# Altium PCB PCB_DesktopAirSensor_2022-05-23.pcbdoc
Units mil, origin at the board's own origin, x right, y up, seen from the top; angles counter-clockwise.
Board outline 3960 x 3620 mil, 2 copper layers (Top Layer, Bottom Layer); 12 components, 47 nets, 83 pads, 6 vias.
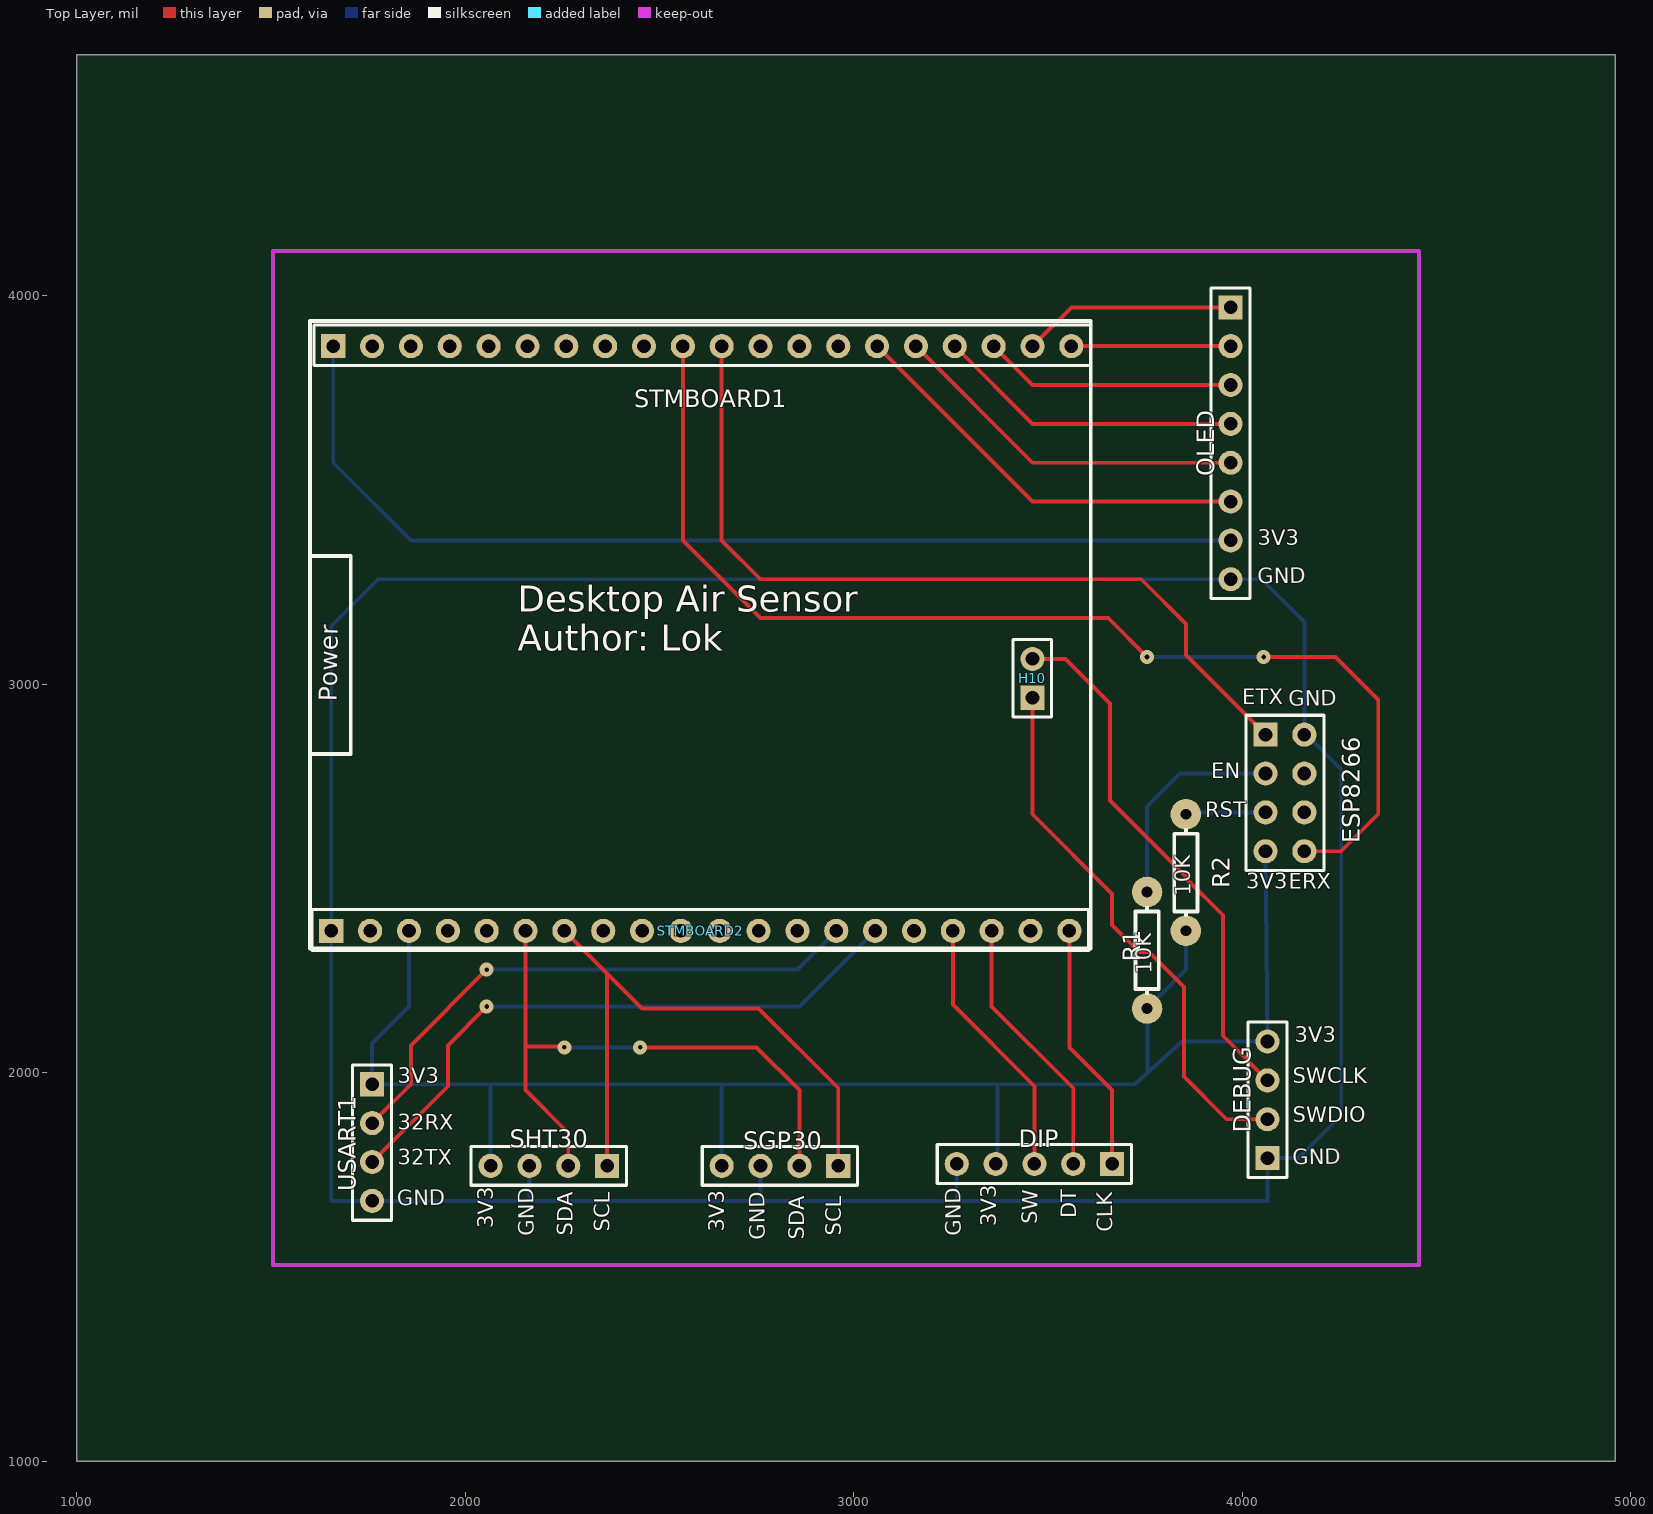
[diagram p0: Top Layer view]
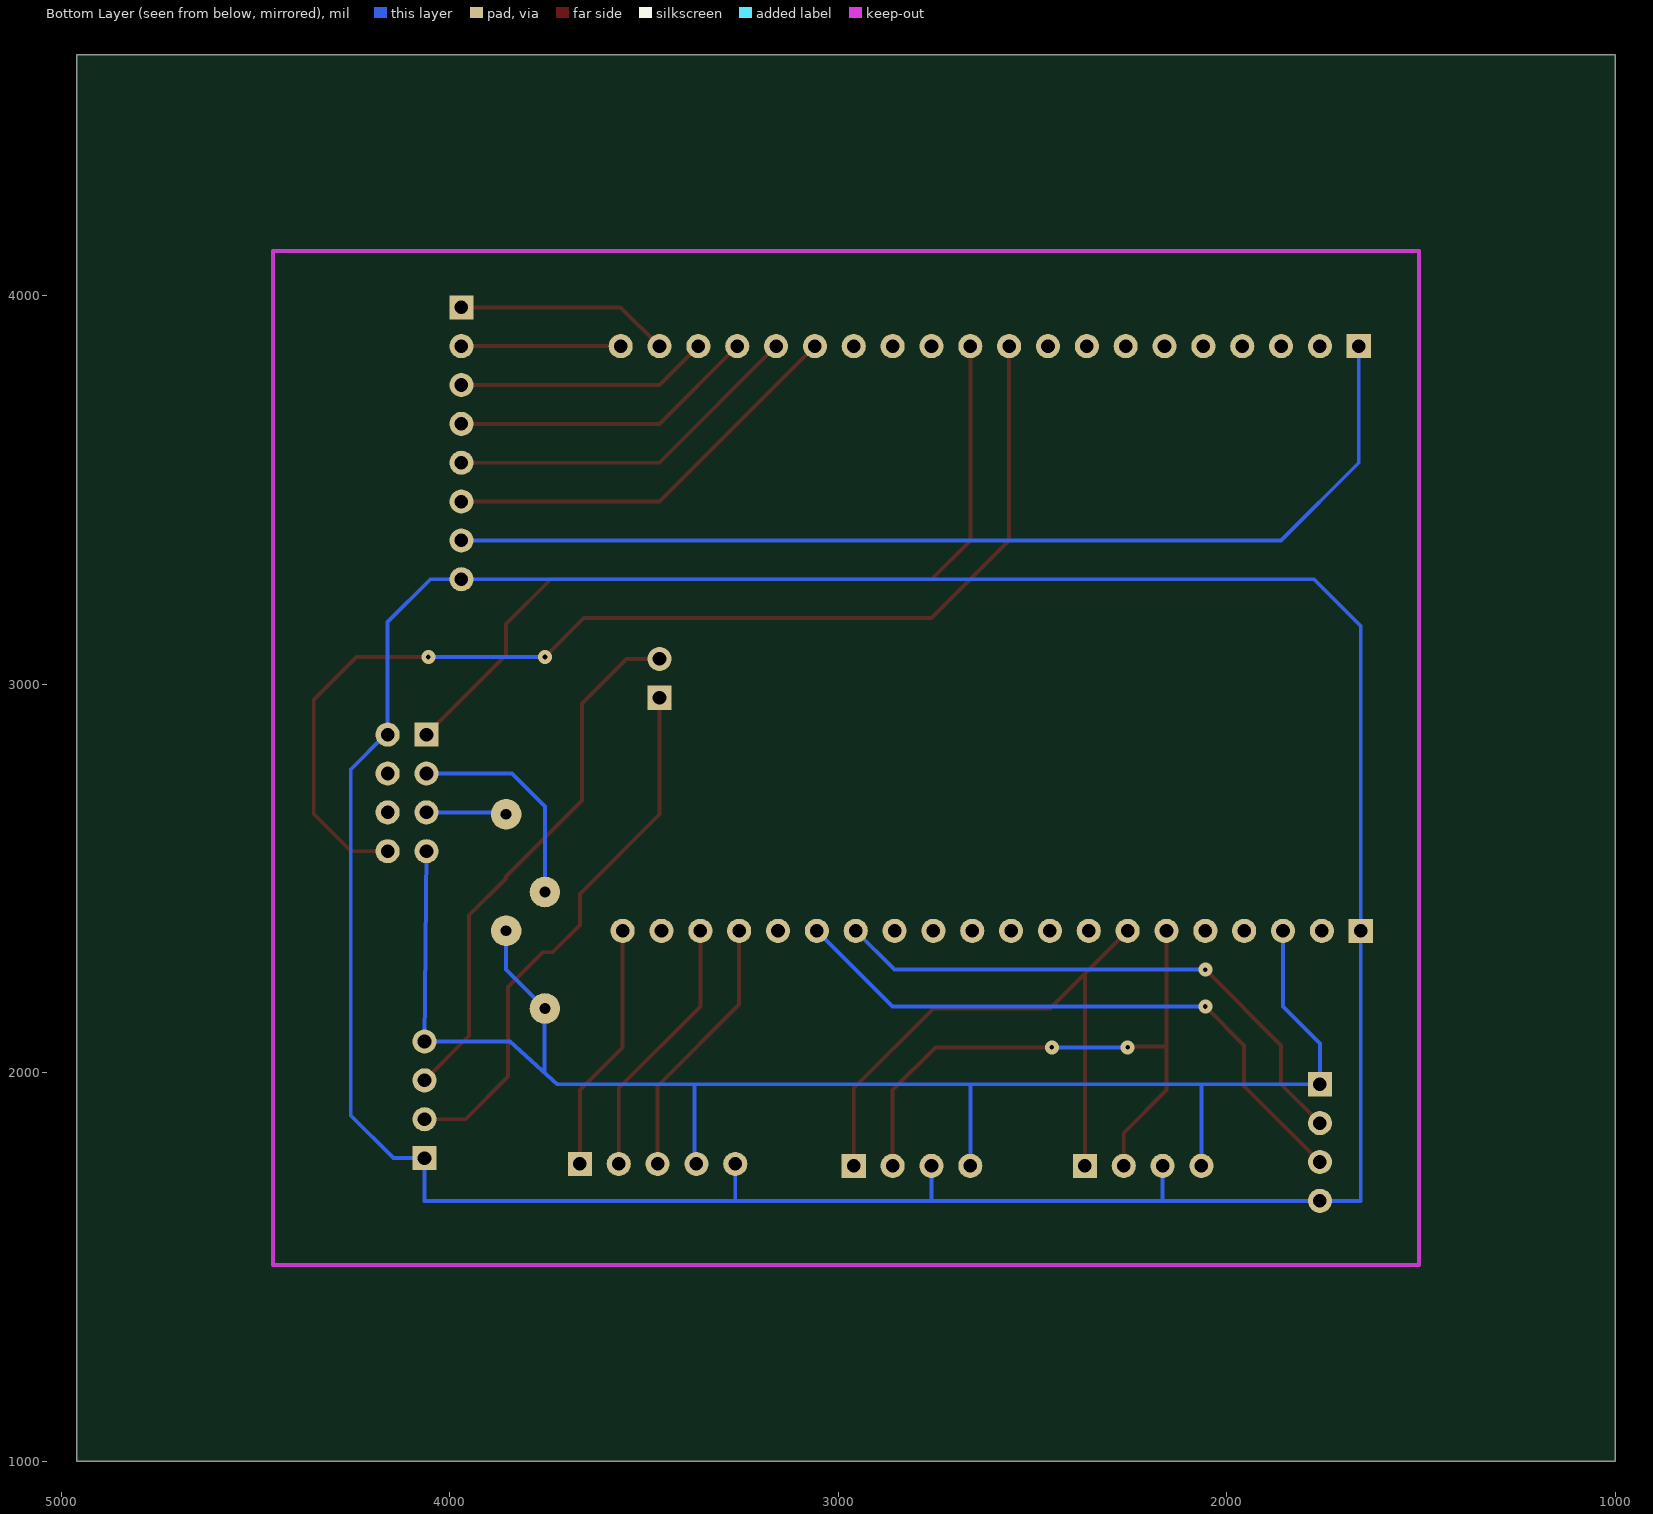
[diagram p1: Bottom Layer view, seen from below]

## Layer stack, top to bottom
Top Solder: solder mask 0.4, Solder Resist, Dk 3.5
Top Layer: signal copper 1.4
Dielectric1: dielectric 12.6, FR-4, Dk 4.8
Bottom Layer: signal copper 1.4
Bottom Solder: solder mask 0.4, Solder Resist, Dk 3.5

## Board outline
4960,1000 1000,1000 1000,4620 4960,4620

## Design rules (kind name [scope] priority, off if disabled: settings)
Clearance [All] p1: gap=10 ignorepadtopadclearanceinfootprint=FALSE except(0: Arc-Hole Track-Hole SMDPad-Hole THPad-Hole Via-Hole Fill-Hole Poly-Hole Region-Hole Text-Hole)
PolygonConnect [All] p1: connectstyle=Relief reliefconductorwidth=10 reliefentries=4 polygonreliefangle="90 Angle" airgapwidth=10
RoutingVias [All] p1: holewidth=28 width=50 viastyle="Through Hole" minholewidth=28 minwidth=50 maxholewidth=28 maxwidth=50
SolderMaskExpansion [All] p1: expansion=4
Width [All] p1: maxlimit=10 minlimit=10 preferedwidth=10
30 further rules are at their usual default settings.

## Components (designator, comment, footprint, x,y, rotation, side; value= is the part's Value field where it differs from the comment)
DEBUG "Debug" HDR-F-2.54_1X4 4065,1930 r90 top
DIP "拨码开关" HDR-F-2.54_1X5 3465,1765 r180 top
ESP8266 "ESP8266" HDR-F-2.54_2X4 4110,2720 r270 top
H10 "STM32 Debug" HDR-F-2.54_1X2 3460,3015 r90 top
OLED "OLED" HDR-F-2.54_1X8 3970,3670 r270 top
R1 "10k" ? 3755,2315 r90 top
R2 "10k" ? 3855,2515 r90 top
SGP30 "SGP30" HDR-F-2.54_1X4 2810,1760 r180 top
SHT30 "SHT30" HDR-F-2.54_1X4 2215,1760 r180 top
STMBOARD1 "STM32板1" HDR-F-2.54_1X20 2610,3870 r0 top
STMBOARD2 "STM32板2" HDR-F-2.54_1X20 2605,2365 r0 top
USART1 "socket" HDR-F-2.54_1X4 1760,1820 r270 top

## Footprints (in the part's own frame and the unit in brackets; to place one, negate y for a bottom-side part, rotate by r counter-clockwise, add the part's x,y. Pads: shape width x height; smd on the part's side, far side on the other; paste and mask are expansions set on the pad)
HDR-F-2.54_1X2 [mil]
  rect 62x62 hole 35: 1(-50,0)
  round 62 hole 35: 2(50,0)
  silkscreen extent -100,-49 100,50
HDR-F-2.54_1X4 [mil]
  rect 62x62 hole 35: 1(-150,0)
  round 62 hole 35: 2(-50,0) 3(50,0) 4(150,0)
  silkscreen extent -200,-50 200,50
HDR-F-2.54_1X5 [mil]
  rect 62x62 hole 35: 1(-200,0)
  round 62 hole 35: 2(-100,0) 3(0,0) 4(100,0) 5(200,0)
  silkscreen extent -250,-50 250,50
HDR-F-2.54_1X8 [mil]
  rect 62x62 hole 35: 1(-300,0)
  round 62 hole 35: 2(-200,0) 3(-100,0) 4(0,0) 5(100,0) 6(200,0) 7(300,0) 8(400,0)
  silkscreen extent -350,-50 450,50
HDR-F-2.54_1X20 [mil]
  rect 62x62 hole 35: 1(-950,0)
  round 62 hole 35: 2(-850,0) 3(-750,0) 4(-650,0) 5(-550,0) 6(-450,0) 7(-350,0) 8(-250,0) 9(-150,0) 10(-50,0) 11(50,0) 12(150,0) 13(250,0) 14(350,0) 15(450,0) 16(550,0) 17(650,0) 18(750,0) 19(850,0) 20(950,0)
  silkscreen extent -1000,-50 1000,55
HDR-F-2.54_2X4 [mil]
  rect 62x62 hole 35: 1(-150,-50)
  round 62 hole 35: 2(-150,50) 3(-50,-50) 4(-50,50) 5(50,-50) 6(50,50) 7(150,-50) 8(150,50)
  silkscreen extent -200,-100 200,100
? [mm]
  round 2 hole 0.7: 1(-3.81,0) 2(3.81,0)
  silkscreen extent -2.79,-0.76 2.79,0.76

## Via types
v1: diameter 35.83, hole 12, Top Layer to Bottom Layer, tented both sides, 6 vias

## Nets (pads, with @x,y where several pads share a name; then routed paths per layer and width w, separated by ;. In a path a pad name is that pad's centre, name@x,y a point inside that pad or via, vN(x,y) a via of type N, cw(c..) or ccw(c..) an arc to the next point about the centre after c; other vN are vias at no path point)
DEBUG_2: DEBUG.2 H10.1 | length 1411.8
  Top Layer w10: H10.1 3460,2665 3665,2460 3665,2380 3735,2310 3760,2310 3850,2220 3850,1990 3960,1880 DEBUG.2
DEBUG_3: DEBUG.3 H10.2 | length 1385.4
  Top Layer w10: H10.2 3545,3065 3660,2950 3660,2700 3855,2505 3855,2500 3950,2405 3950,2095 DEBUG.3
ESP8266_3: ESP8266.3 R1.2 | length 560.2
  Bottom Layer w10: R1.2 3755,2685 3840,2770 ESP8266.3
ESP8266_4: ESP8266.4
ESP8266_5: ESP8266.5 R2.2 | length 207.1
  Bottom Layer w10: R2.2 3860,2670 ESP8266.5
ESP8266_6: ESP8266.6
STMBOARD1_1: OLED.7 STMBOARD1.1 | length 2692.8
  Bottom Layer w10: STMBOARD1.1 1660,3570 1860,3370 OLED.7
STMBOARD1_2: STMBOARD1.2
STMBOARD1_3: STMBOARD1.3
STMBOARD1_4: STMBOARD1.4
STMBOARD1_5: STMBOARD1.5
STMBOARD1_6: STMBOARD1.6
STMBOARD1_7: STMBOARD1.7
STMBOARD1_8: STMBOARD1.8
STMBOARD1_9: STMBOARD1.9
STMBOARD1_10: ESP8266.8 STMBOARD1.10 | length 2984.2
  Top Layer w10: STMBOARD1.10 2560,3370 2760,3170 3655,3170 v1(3755,3070) ; v1(4055,3070) 4240,3070 4350,2960 4350,2665 4255,2570 ESP8266.8
  Bottom Layer w10: v1(3755,3070) v1(4055,3070)
STMBOARD1_11: ESP8266.1 STMBOARD1.11 | length 2154
  Top Layer w10: STMBOARD1.11 2660,3370 2760,3270 3740,3270 3855,3155 3855,3075 ESP8266.1
STMBOARD1_12: STMBOARD1.12
STMBOARD1_13: STMBOARD1.13
STMBOARD1_14: STMBOARD1.14
STMBOARD1_15: OLED.6 STMBOARD1.15 | length 1075.7
  Top Layer w10: STMBOARD1.15 3460,3470 OLED.6
STMBOARD1_16: OLED.5 STMBOARD1.16 | length 934.3
  Top Layer w10: STMBOARD1.16 3460,3570 OLED.5
STMBOARD1_17: OLED.4 STMBOARD1.17 | length 792.8
  Top Layer w10: STMBOARD1.17 3460,3670 OLED.4
STMBOARD1_18: OLED.3 STMBOARD1.18 | length 651.4
  Top Layer w10: STMBOARD1.18 3460,3770 OLED.3
STMBOARD1_19: OLED.1 STMBOARD1.19 | length 551.4
  Top Layer w10: STMBOARD1.19 3560,3970 OLED.1
STMBOARD1_20: OLED.2 STMBOARD1.20 | length 410
  Top Layer w10: STMBOARD1.20 OLED.2
STMBOARD2_1: DEBUG.1 DIP.5 ESP8266.2 OLED.8 SGP30.3 SHT30.3 STMBOARD2.1 USART1.4 | length 8423.1
  Bottom Layer w10: 2165,1670 SHT30.3 ; 2760,1670 SGP30.3 ; DIP.5 3265,1670 ; 3265,1670 4065,1670 DEBUG.1 4145,1780 4255,1890 4255,2780 4165,2870 ESP8266.2 4160,3160 4050,3270 OLED.8 1775,3270 1655,3150 STMBOARD2.1 1655,1670 USART1.4 3265,1670
STMBOARD2_2: STMBOARD2.2
STMBOARD2_3: DEBUG.4 DIP.4 ESP8266.7 R2.1 SGP30.4 SHT30.4 STMBOARD2.3 USART1.1 | length 3898.7
  Bottom Layer w10: STMBOARD2.3 1855,2170 1760,2075 USART1.1 3370,1970 ; SHT30.4 2065,1970 ; SGP30.4 2660,1970 ; DIP.4 3370,1770 3370,1970 ; ESP8266.7 DEBUG.4 3847.09,2080 3845,2080 3722.91,1970 3370,1970
STMBOARD2_4: STMBOARD2.4
STMBOARD2_5: STMBOARD2.5
STMBOARD2_6: SGP30.2 SHT30.2 STMBOARD2.6 | length 1596.9
  Top Layer w10: 2155,2066.94 2253.06,2066.94 v1(2255,2065) ; STMBOARD2.6 2155,1955 2265,1845 SHT30.2 ; v1(2450,2065) 2750,2065 2860,1955 SGP30.2
  Bottom Layer w10: v1(2255,2065) v1(2450,2065)
STMBOARD2_7: SGP30.1 SHT30.1 STMBOARD2.7 | length 1574.8
  Top Layer w10: STMBOARD2.7 2365,2255 SHT30.1 ; 2360,2260 2455,2165 2755,2165 2960,1960 SGP30.1
STMBOARD2_8: STMBOARD2.8
STMBOARD2_9: STMBOARD2.9
STMBOARD2_10: STMBOARD2.10
STMBOARD2_11: STMBOARD2.11
STMBOARD2_12: STMBOARD2.12
STMBOARD2_13: STMBOARD2.13
STMBOARD2_14: STMBOARD2.14 USART1.2 | length 1458.6
  Top Layer w10: USART1.2 1860,1970 1860,2070 v1(2055,2265)
  Bottom Layer w10: v1(2055,2265) 2855,2265 STMBOARD2.14
STMBOARD2_15: STMBOARD2.15 USART1.3 | length 1603
  Top Layer w10: USART1.3 1955,1965 1955,2070 v1(2055,2170)
  Bottom Layer w10: v1(2055,2170) 2860,2170 STMBOARD2.15
STMBOARD2_16: STMBOARD2.16
STMBOARD2_17: DIP.3 STMBOARD2.17 | length 687
  Top Layer w10: STMBOARD2.17 3255,2175 3465,1965 DIP.3
STMBOARD2_18: DIP.2 STMBOARD2.18 | length 687
  Top Layer w10: STMBOARD2.18 3355,2170 3565,1960 DIP.2
STMBOARD2_19: STMBOARD2.19
STMBOARD2_20: DIP.1 STMBOARD2.20 | length 645.6
  Top Layer w10: STMBOARD2.20 3555,2065 3665,1955 DIP.1
VCC: R1.1 | length 403.6
  Bottom Layer w10: 3756.19,2003.28 3756.19,2163.81 R1.1 3855,2265 3855,2365

## Silkscreen, mask and mechanical layers (free items; w line width, h text height)
Top Overlay:
  lines w10: 1600,2320 3610,2320 3610,3935 1600,3935 1600,2320 ; 1600,2820 1705,2820 1705,3330 1600,3330 1600,2820
  text "3V3" at 4040,3345 h66.93
  text "GND" at 4040,3245 h66.93 r1
  text "Desktop Air Sensor / Author: Lok" at 2135,3086.54 h66.93
  text "Power" at 1685,2955 h80 r89
  text "ETX" at 4000,2935 h66.93
  text "GND" at 4120,2930 h66.93 r1
  text "EN" at 3920,2745 h66.93
  text "RST" at 3905,2645 h66.93
  text "3V3" at 4010,2460 h66.93
  text "ERX" at 4120,2460 h66.93
  text "10K" at 3880,2455 h66.93 r91
  text "10K" at 3780,2255 h66.93 r91
  text "3V3" at 4135,2065 h66.93
  text "3V3" at 1826.7,1960 h66.93
  text "SWCLK" at 4130,1960 h66.93
  text "SWDIO" at 4130,1860 h66.93
  text "32RX" at 1826.7,1840 h66.93
  text "32TX" at 1826.7,1750 h66.93
  text "GND" at 4130,1750 h66.93 r1
  text "GND" at 1825,1645 h66.93 r1
  text "DT" at 3585,1625 h66.93 r90
  text "SW" at 3485,1610 h66.93 r89
  text "3V3" at 3380,1605 h66.93 r90
  text "3V3" at 2085,1600 h66.93 r90
  text "SCL" at 2385,1590 h66.93 r90
  text "3V3" at 2680,1590 h66.93 r90
  text "CLK" at 3680,1590 h66.93 r91
  text "GND" at 2190,1580 h66.93 r91
  text "SDA" at 2290,1580 h66.93 r90
  text "SCL" at 2980,1580 h66.93 r90
  text "GND" at 3290,1580 h66.93 r91
  text "GND" at 2785,1570 h66.93 r91
  text "SDA" at 2885,1570 h66.93 r90
Document:
  lines w0.1: 2979.99,2809.99 2980.01,2810.01